# Altium PCB tof_sideXtal.PcbDoc (part 2 of 2)
Units mm, origin at the board's own origin, x right, y up, seen from the top; angles counter-clockwise.
Board outline 22 x 110.3 mm, 6 copper layers (Top Layer, Timing, InternalPlane1, InternalPlane2, Energy, Bottom Layer); 240 components, 145 nets, 707 pads, 213 vias.
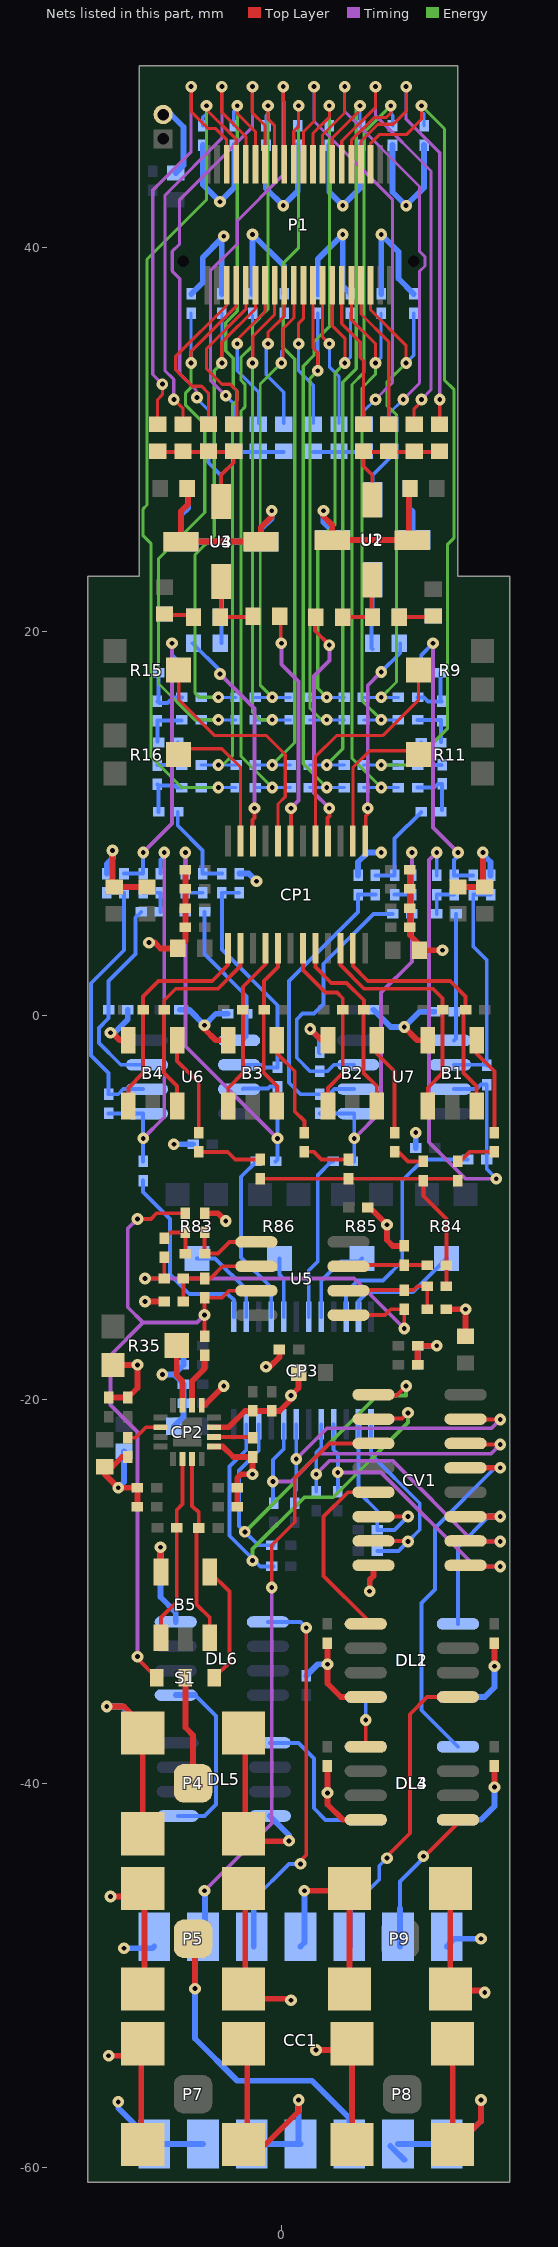
[diagram p6: the nets of this part, all layers, seen from the top]

## Via types
v1: diameter 0.61, hole 0.25, Top Layer to Bottom Layer, 213 vias

## Nets (pads, with @x,y where several pads share a name; then routed paths per layer and width w, separated by ;. In a path a pad name is that pad's centre, name@x,y a point inside that pad or via, vN(x,y) a via of type N, cw(c..) or ccw(c..) an arc to the next point about the centre after c; other vN are vias at no path point) (continued)
GND: B1.4 B2.4 B3.4 B4.4 B5.4 C17.2 C19.2 C21.2 C22.2 C23.2 C24.2 C25.2 C28.2 C29.1 C30.1 C31.1 C32.1 C33.2 C34.1 C35.1 C36.1 C37.1 C39.2 C43.2 C44.1 C46.2 C47.1 C48.1 C49.1 C50.1 C51.2 C52.1 C53.1 C54.1 C55.1 C56.1 C57.1 C58.1 C59.1 C60.2 C61.2 C62.2 C63.1 C64.2 C65.2 C66.1 C67.2 C68.2 C69.1 C70.1 C71.1 C72.1 C74.2 C76.2 C78.2 C80.2 C81.1 C82.1 C83.1 C84.1 C85.1 C86.1 CC1.1 CC1.4 CC1.7 CC1.8 CC1.9 CC1.11 CC1.12 CC1.13 CC1.14 CP2.1 CP2.13 CP2.15 CV1.8 DL1.4 DL2.4 DL3.4 DL4.4 DL5.4 DL6.4 P4.2 P5.2 P6.2 P7.2 P8.2 P9.2 R1g.1 R2.2 R2g.1 R3g.1 R4g.1 R5g.1 R6g.1 R7.2 R7g.1 R8g.1 R9g.1 R10g.1 R11g.1 R12g.1 R13g.1 R14g.1 R15g.1 R16g.1 R32.2 R33.1 R34.2 R35.CCW R71.2 R73.2 R87.2 R89.2 U1.2 U1.4 U2.2 U2.4 U3.2 U3.4 U4.2 U4.4 | length 308.7
  Top Layer w0.3: v1(-9,-54.2) P7.2@-7.3,-54.2 ; C47.1@-9,-19.9 C50.1@-8,-19.9 -7.5,-19.4 v1(-7.5,-18.2) R35.CCW@-8.775,-18.2 ; v1(-8.9,-45.9) -7.225,-45.9 -7.2,-45.9 -7.125,-45.975 -7.125,-50.725 P5.2@-7.125,-51.225 ; v1(-8.9,-0.9) -8.8,-0.9 -8.415,-1.285 B4.4@-7.97,-1.285 ; v1@-8.8,-36 -8.2,-36 -7.225,-36.975 P4.2@-7.225,-37.375 -7.225,-37.775 P4.2@-7.225,-42.625 P4.2@-7.225,-43.025 ; v1(-8.8,8.6) -8.8,7 -8.6,6.8 -8.5,6.7 C61.2@-7,6.7 ; R33.1@-8,-23 -8.3,-23 -8.8,-23.5 C51.2@-9.2,-23.5 -9.2,-23.9 v1(-8.5,-24.6) C52.1@-7.5,-24.6 C53.1@-7.5,-25.6 ; P7.2@-7.3,-58.9 -7.3,-58.825 P7.2@-7.3,-54.2 ; v1(-7.1,-14.9) R2.2@-6.1,-14.9 ; v1(-6.9,3.8) -6.6,3.8 -6.3,3.5 C28.2@-5.4,3.5 -5,3.9 C29.1@-5,4.6 C32.1@-5,5.6 C31.1@-5,6.6 C30.1@-5,7.6 ; v1(-6.3,-27.7) -6.3,-28.955 B5.4@-6.27,-28.985 ; C24.2@-4.854,27.464 -4.854,26.646 -5.225,26.275 U4.2@-5.225,24.696 U4.4@-1.055,24.696 -1.055,25.445 -0.5,26 v1(-0.5,26.3) ; CP2.1@-4.15,-20.303 -4.003,-20.303 v1(-3,-19.3) ; C43.2@-4,-10.3 -3.3,-10.3 v1(-2.9,-10.7) ; v1(-4,-0.5) -4,-0.7 -3.415,-1.285 B3.4@-2.77,-1.285 ; CP2.13@-3.503,-22.45 -3.05,-22.45 -2.5,-23 R34.2@-1.5,-23 v1(-1.5,-23.9) -2.1,-23.9 -2.3,-24.1 C54.1@-2.3,-24.6 C55.1@-2.3,-25.6 ; CP2.15@-3.503,-21.45 -2.75,-21.45 -1.9,-20.6 C48.1@-1.5,-20.6 C49.1@-0.5,-20.6 -0.1,-20.6 0.5,-20 v1(0.5,-19.8) 0.9,-19.4 C22.2@0.9,-18.6 ; P5.2@-1.875,-45.975 -1.875,-50.725 -1.875,-51.225 0.425,-51.225 v1(0.5,-51.3) ; P4.2@-1.875,-37.775 -1.875,-42.625 -1.875,-43.025 0.375,-43.025 v1(0.4,-43) ; P7.2@-1.775,-53.575 -1.775,-58.825 -0.825,-58.825 0.9,-57.1 v1(0.9,-56.5) ; v1(-0.8,-18.3) -0.6,-18.3 -0.1,-17.8 C39.2@-0.1,-17.4 ; v1(1.2,-45.6) 3.18,-45.6 3.305,-45.725 3.555,-45.975 P9.2@3.555,-50.725 P9.2@3.555,-51.225 ; v1(1.5,-0.7) 2.085,-1.285 B2.4@2.43,-1.285 ; v1(1.8,-53.9) 3.4,-53.9 3.675,-54.175 P8.2@3.675,-58.825 P8.2@3.675,-59.425 ; v1(2.2,26.3) 2.2,26 2.65,25.55 U1.2@2.65,24.772 U1.4@6.82,24.772 6.652,24.94 C17.2@6.652,27.464 ; C83.1@2.4,-39.1 v1(2.4,-40.5) 2.4,-41.1 3.205,-41.905 DL3.4@4.4,-41.905 ; C82.1@2.4,-32.7 v1(2.4,-33.8) 2.4,-34.8 3.105,-35.505 DL1.4@4.4,-35.505 ; C44.1@4.5,-10 4.6,-10 v1(5.5,-10.9) 5.5,-11.7 5.8,-12 R32.2@6.4,-12 ; v1(4.6,-30) 4.6,-29.4 4.8,-29.2 CV1.8@4.8,-28.645 ; v1(6.4,-0.6) 7.085,-1.285 B1.4@7.63,-1.285 ; C35.1@6.7,7.6 C37.1@6.7,6.6 C36.1@6.7,5.6 C34.1@6.7,4.6 6.7,4.2 7.2,3.7 C33.2@7.2,3.4 v1(8.4,3.4) ; C58.1@7.1,-18.1 C56.1@7.1,-17.2 v1(8.1,-17.2) ; R7.2@8.6,-15.3 v1(9.6,-15.3) C21.2@9.6,-16.7 ; P9.2@8.805,-50.8 v1@10.6,-50.8 ; P9.2@8.805,-50.725 P9.2@8.805,-45.975 ; P8.2@8.925,-53.575 P8.2@8.925,-58.825 8.925,-59.075 9.05,-58.95 10.4,-57.6 v1(10.4,-56.5) ; C63.1@9.2,6.7 C66.1@10.6,6.7 10.5,6.8 v1(10.5,8.5) ; v1(11.1,-40.2) C86.1@11.1,-39.1 ; v1(11.1,-33.9) C85.1@11.1,-32.7 ; P7.2@-7.3,-54.2 -7.225,-54.2 -7.15,-54.2 -7.3,-54.05 P7.2@-7.3,-54.2
  Bottom Layer w0.3: R71.2@-9.1,7.4 -9.1,7.9 -8.8,8.2 v1(-8.8,8.6) ; v1(-8.9,-0.9) -8.7,-0.9 -8,-0.2 C74.2@-8,0.3 ; v1@-8.8,-36 -8.3,-36 C81.1@-7.4,-36.9 ; v1(-8.5,-56.6) -8.5,-56.92 CC1.14@-6.62,-58.8 CC1.13@-4.08,-58.8 ; v1(-8.5,-24.6) -8.2,-24.3 C46.2@-8.2,-22.7 ; v1(-8.2,-48.6) -6.72,-48.6 CC1.1@-6.62,-48.5 ; v1(-6.3,-27.7) -6.3,-30.3 -5.5,-31.1 DL6.4@-5.5,-31.595 ; v1(-6.2,-18.7) -5.6,-18.7 ; P6.2@-6.161,46.946 -5.746,46.946 -5.1,46.3 -5.1,44.3 C23.2@-5.5,43.9 ; C68.2@-5.6,-21.4 -5.1,-20.9 C70.1@-5.1,-20.2 C72.1@-5.1,-19.2 ; v1(-5.6,-6.7) C65.2@-4.6,-6.7 ; C67.2@-5.3,0.3 -4.8,0.3 v1(-4,-0.5) -3.4,0.1 C76.2@-2.8,0.1 ; C71.1@-5.1,-17.2 C69.1@-5.1,-18.2 -5.6,-18.7 ; C25.2@-4.854,27.464 -4.854,26.446 -5.225,26.075 U3.4@-5.225,24.696 U3.2@-1.055,24.696 -1.055,25.345 -0.5,25.9 v1(-0.5,26.3) ; R8g.1@-4.7,37.6 -4.1,38.2 -4.1,39.5 v1@-3.1,40.5 ; R16g.1@-4.093,45.352 -4.093,43.293 v1(-3.2,42.4) -2.446,43.154 R12g.1@-2.446,45.352 ; R4g.1@-3.1,37.6 v1@-3.1,40.5 ; v1(-3,40.6) v1@-3.1,40.5 ; R73.2@-2.2,7.4 -1.7,7.4 v1(-1.3,7) ; CC1.12@-1.54,-58.8 CC1.11@1,-58.8 0.9,-58.7 v1(0.9,-56.5) ; R7g.1@-1.5,37.6 v1(-1.5,40.7) 0.15,39.05 R3g.1@0.15,37.6 ; R15g.1@-0.799,45.352 -0.799,43.099 v1(0.1,42.2) 0.848,42.948 R11g.1@0.848,45.352 ; DL5.4@-0.6,-41.705 0.4,-42.705 v1(0.4,-43) ; CC1.4@1,-48.5 1.2,-48.3 1.2,-48 v1(1.2,-45.6) ; C84.1@1.3,-34.4 1.9,-33.8 v1@2.3,-33.8 ; v1(1.5,-0.7) 2,-1.2 C80.2@2,-1.9 ; R6g.1@1.9,37.6 1.9,39.4 v1(3.2,40.7) 3.2,38.002 R2g.1@3.602,37.6 ; v1(2.2,26.3) 2.2,25.7 2.889,25.011 3.104,24.796 U2.2@6.845,24.796 6.845,26.255 6.652,26.448 C19.2@6.652,27.464 ; R14g.1@2.495,45.352 2.495,42.905 v1(3.2,42.2) 4.142,43.142 R10g.1@4.142,45.352 ; R89.2@4,7.3 4,8 4.5,8.5 v1(5.2,8.5) ; C64.2@4.8,0.3 5.7,-0.6 v1(6.4,-0.6) 7.2,0.2 C78.2@8,0.2 ; R5g.1@5.2,37.6 v1(5.2,40.7) 6.1,39.8 6.1,38.396 R1g.1@6.896,37.6 ; CC1.9@5.68,-58.9 5.83,-59.05 6.4,-59.62 CC1.9@6.42,-59.62 ; R13g.1@5.789,45.352 5.789,42.911 v1(6.5,42.2) 7.436,43.136 R9g.1@7.436,45.352 ; CC1.9@6.08,-58.8 CC1.8@8.62,-58.8 9.2,-58.8 10.4,-57.6 v1(10.4,-56.5) ; C62.2@7,-6.9 7,-6.7 v1(7,-6.1) ; C59.1@7.108,-18.2 C57.1@7.108,-17.2 v1(8.1,-17.2) ; CC1.8@8.22,-58.9 8.37,-59.05 CC1.8@8.62,-59.3 ; CC1.7@8.62,-48.5 8.87,-48.25 9.02,-48.1 v1(10.4,-48.1) ; DL4.4@9.2,-41.905 10.395,-41.905 11.1,-41.2 v1(11.1,-40.2) ; DL2.4@9.2,-35.505 10.595,-35.505 11.1,-35 v1(11.1,-33.9) ; v1(10.5,8.5) 10.5,8.4 10.9,8 R87.2@10.9,7.3 ; -5.6,-18.7 C72.1@-5.1,-19.2 ; -5.6,-18.7 C72.1@-5.1,-19.2
  other v1: 10.6,-50.9 -9.1,-36
NetB1_1: B1.1 CP1.23 R17.2 | length 13.3
  Top Layer w0.2: CP1.23@3.725,3.5 3.725,2.575 4.5,1.8 8.8,1.8 9.6,1 R17.2@9.6,0.3 ; R17.2@9.487,0.187 9.487,-2.987 10.17,-3.67 B1.1@10.17,-4.715
NetB1_3: B1.3 CP1.22 R18.2 | length 12.7
  Top Layer w0.2: CP1.22@3.075,3.5 3.075,2.625 4.3,1.4 7.9,1.4 8.4,0.9 R18.2@8.4,0.3 ; B1.3@7.63,-4.715 7.63,-3.77 8.4,-3 R18.2@8.4,0.2
NetB1_5: B1.5 C38.1 | length 5.1
  Top Layer w0.2: B1.5@10.17,-1.285 10.17,-1.97 11.1,-2.9 C38.1@11.1,-6
NetB2_1: B2.1 CP1.20 R19.2 | length 9.9
  Top Layer w0.2: CP1.20@1.775,3.5 1.775,2.525 2.6,1.7 3.4,1.7 4.3,0.8 R19.2@4.3,0.3 ; R19.2@4.287,0.187 4.287,-2.987 4.97,-3.67 B2.1@4.97,-4.715
NetB2_3: B2.3 CP1.19 R20.2 | length 9.6
  Top Layer w0.2: CP1.19@1.125,3.5 1.125,2.375 2.3,1.2 2.9,1.2 3.2,0.9 R20.2@3.2,0.3 ; B2.3@2.43,-4.715 2.43,-3.77 3.2,-3 R20.2@3.2,0.2
NetB2_5: B2.5 C40.1 | length 5
  Top Layer w0.2: B2.5@4.97,-1.285 4.97,-1.97 5.9,-2.9 C40.1@5.9,-5.9
NetB3_1: B3.1 CP1.17 R21.2 | length 8.7
  Top Layer w0.2: R21.2@-0.913,0.187 -0.913,-2.987 -0.23,-3.67 B3.1@-0.23,-4.715 ; R21.2@-0.9,0.3 -0.9,1.8 -0.175,2.525 CP1.17@-0.175,3.5
NetB3_3: B3.3 CP1.16 R22.2 | length 8.9
  Top Layer w0.2: B3.3@-2.77,-4.715 -2.77,-3.77 -2,-3 R22.2@-2,0.2 ; R22.2@-2,0.3 -2,1.5 -0.825,2.675 CP1.16@-0.825,3.5
NetB3_5: B3.5 C41.1 | length 5.4
  Top Layer w0.2: B3.5@-0.23,-1.285 -0.23,-1.97 0.7,-2.9 0.7,-5 1.2,-5.5 C41.1@1.2,-6.1
NetB4_1: B4.1 CP1.14 R23.2 | length 11.3
  Top Layer w0.2: R23.2@-6.1,0.2 -6.113,0.187 -6.113,-2.987 -5.43,-3.67 B4.1@-5.43,-4.715 ; R23.2@-6.1,0.3 -6.1,0.8 -5.5,1.4 -3.3,1.4 -2.125,2.575 CP1.14@-2.125,3.5
NetB4_3: B4.3 CP1.13 R24.2 | length 11.9
  Top Layer w0.2: B4.3@-7.97,-4.715 -7.97,-3.77 -7.2,-3 R24.2@-7.2,0.2 ; R24.2@-7.2,0.3 -7.2,1 -6.4,1.8 -3.6,1.8 -2.775,2.625 CP1.13@-2.775,3.5
NetB4_5: B4.5 C45.1 | length 5.3
  Top Layer w0.2: B4.5@-5.43,-1.285 -5.43,-2.37 -4.3,-3.5 C45.1@-4.3,-6.1
NetB5_1: B5.1 CP2.11 R36.2 | length 9.8
  Top Layer w0.2: CP2.11@-4.65,-23.097 -4.65,-25.55 -4.3,-25.9 R36.2@-4.3,-26.7 -4.413,-26.813 -4.413,-30.687 -3.73,-31.37 B5.1@-3.73,-32.415
NetB5_3: B5.3 CP2.10 R37.2 | length 9.8
  Top Layer w0.2: B5.3@-6.27,-32.415 -6.27,-31.37 -5.453,-30.553 R37.2@-5.453,-26.682 -5.453,-25.753 -5.15,-25.45 CP2.10@-5.15,-23.097
NetB5_5: B5.5 S1.1 | length 6.3
  Top Layer w0.2: B5.5@-3.73,-28.985 -2.7,-30.015 -2.7,-33.7 S1.1@-3.5,-34.5
NetC1_1: C1.1 C5.1 C9.1 C13.1 U1.1 | length 6.7
  Top Layer w0.2: U1.1@4.735,26.857 4.735,28.165 4.278,28.622 4.278,29.356 5.599,29.356 6.92,29.356 C9.1@8.241,29.356
NetC1_2: C1.2 P1.4 | length 7.8
  Top Layer w0.165: P1.4@4.15,38.05 4.15,36.55 5.599,35.101 C1.2@5.599,30.856
NetC2_1: C2.1 C6.1 C10.1 C14.1 U2.1 | length 6.8
  Bottom Layer w0.2: C6.1@1.678,29.356 2.999,29.356 4.32,29.356 5.641,29.356 5.641,29.041 4.76,28.16 U2.1@4.76,26.881
NetC2_2: C2.2 P1.8 | length 7.5
  Top Layer w0.165: P1.8@2.15,38.05 2.15,35.35 v1(2.5,35)
  Bottom Layer w0.165: v1(2.5,35) 2.5,33.8 2.999,33.301 C2.2@2.999,30.856
NetC3_1: C3.1 C7.1 C11.1 C15.1 U3.1 | length 6.8
  Bottom Layer w0.2: U3.1@-3.14,26.781 -3.14,28.14 -3.799,28.799 -3.799,29.356 -2.478,29.356 -1.199,29.356 C3.1@0.122,29.356
NetC3_2: C3.2 P1.12 | length 8
  Top Layer w0.165: v1(-0.7,35) -0.7,35.586 0.15,36.436 P1.12@0.15,38.05
  Bottom Layer w0.165: v1(-0.7,35) -0.791,34.909 -0.791,33.391 0.122,32.478 C3.2@0.122,30.856
NetC4_1: C4.1 C8.1 C12.1 C16.1 U4.1 | length 6.8
  Top Layer w0.2: C16.1@-6.441,29.356 -5.12,29.356 -3.799,29.356 -2.478,29.356 -2.478,28.822 -3.14,28.16 U4.1@-3.14,26.781
NetC4_2: C4.2 P1.16 | length 9
  Top Layer w0.165: C4.2@-2.478,30.856 -2.309,31.025 -2.309,32.545 -2.655,32.891 -3.091,32.891 -3.9,33.7 -3.9,34.752 -1.85,36.802 P1.16@-1.85,38.05
NetC5_2: C5.2 P1.6 | length 7.7
  Top Layer w0.165: P1.6@3.15,38.05 3.15,36.05 4.111,35.089 4.111,34.289 4.278,34.122 C5.2@4.278,30.856
NetC6_2: C6.2 P1.10 | length 7.6
  Top Layer w0.165: v1(0.9,35) 0.9,36.063 1.15,36.313 P1.10@1.15,38.05
  Bottom Layer w0.165: v1(0.9,35) 0.9,33.6 1.678,32.822 C6.2@1.678,30.856
NetC7_2: C7.2 P1.14 | length 8.3
  Top Layer w0.165: v1(-2.3,35) -2.3,35.226 -0.85,36.676 P1.14@-0.85,38.05
  Bottom Layer w0.165: v1(-2.3,35) -2.3,33.6 -1.199,32.499 C7.2@-1.199,30.856
NetC8_2: C8.2 P1.18 | length 9.3
  Top Layer w0.165: C8.2@-3.799,30.856 -3.799,32.434 -4.155,32.791 -4.645,32.791 -5.5,33.646 -5.5,34.346 -2.85,36.996 P1.18@-2.85,38.05
NetC9_2: C9.2 P1.37 | length 23.8
  Top Layer w0.165: P1.37@4.15,44.35 4.15,45.55 5.038,46.438 5.838,46.438 6.513,47.113 v1@6.513,48.4 ; C9.2@8.25,30.865 v1(8.25,32.1)
  Timing w0.165: v1(6.5,48.4) 6.5,46.7 8.25,44.95 v1(8.25,32.1)
NetC10_2: C10.2 P1.33 | length 24.6
  Top Layer w0.152: P1.33@2.15,44.35 2.15,45.885 3.288,47.022 v1@3.288,48.4
  Timing w0.152: v1(3.3,48.4) 3.3,47.1 7.2,43.2 7.2,39.819 7.479,39.54 7.479,39.06 7.2,38.781 7.2,32.95 v1(6.35,32.1)
  Bottom Layer w0.152: C10.2@5.641,30.856 5.641,31.391 v1(6.35,32.1)
NetC11_2: C11.2 P1.29 | length 23.7
  Top Layer w0.165: v1(0.1,48.4) 0.1,47.67 0.15,47.62 P1.29@0.15,44.35
  Timing w0.165: v1(-2.9,32.3) -3.7,33.1 -3.7,38.8 -2.3,40.2 -2.3,41.4 0.1,43.8 v1(0.1,48.4)
  Bottom Layer w0.165: v1(-2.9,32.3) -2.478,31.878 C11.2@-2.478,30.856
NetC12_2: C12.2 P1.25 | length 23.9
  Top Layer w0.165: v1(-5.6,32.1) -5.5,32.1 -5.5,32 -5.12,31.62 C12.2@-5.12,30.856 ; v1@-3.113,48.4 -3.113,47.065 -1.85,45.802 P1.25@-1.85,44.35
  Timing w0.165: v1(-5.6,32.1) -5.5,32.1 -5.55,32.15 -5.608,32.208 -5.608,32.756 -5.609,32.758 -5.609,33.145 -6.061,33.596 -6.061,42.739 -3.1,45.7 v1(-3.1,48.4)
NetC13_2: C13.2 P1.35 | length 23.9
  Top Layer w0.165: P1.35@3.15,44.35 3.15,45.564 4.913,47.327 v1@4.913,48.4 ; C13.2@6.92,30.856 6.92,31.62 7.3,32 v1(7.3,32.1)
  Timing w0.165: v1(4.9,48.4) 4.9,46.9 7.798,44.002 7.798,32.598 v1(7.3,32.1)
NetC14_2: C14.2 P1.31 | length 24.1
  Top Layer w0.152: P1.31@1.15,44.35 1.15,46.053 1.713,46.616 v1@1.713,48.4
  Timing w0.152: v1(1.7,48.4) 1.7,46.6 5.8,42.5 5.8,33 v1(4.9,32.1)
  Bottom Layer w0.152: C14.2@4.32,30.856 4.32,31.52 v1(4.9,32.1)
NetC15_2: C15.2 P1.27 | length 24.5
  Top Layer w0.165: v1@-1.513,48.4 -1.513,47.048 -0.85,46.385 P1.27@-0.85,44.35
  Timing w0.165: v1(-4.4,32.2) -4.45,32.2 -4.45,32.596 -5.292,33.438 -5.292,38.392 -5.686,38.786 -5.686,39.814 -5.3,40.2 -5.3,42.5 -1.5,46.3 v1(-1.5,48.4)
  Bottom Layer w0.165: v1(-4.4,32.2) -4.45,32.2 -4.425,32.175 -3.799,31.549 C15.2@-3.799,30.856
NetC16_2: C16.2 P1.23 | length 23.7
  Top Layer w0.165: C16.2@-6.45,30.865 -6.45,32.1 -6.2,32.35 v1(-6.2,32.9) ; v1@-4.688,48.4 -4.688,47.099 -3.799,46.21 -3.418,46.21 -2.85,45.642 P1.23@-2.85,44.35
  Timing w0.165: v1(-6.2,32.9) -6.7,33.4 -6.7,43 -4.7,45 v1(-4.7,48.4)
NetC18_1: C18.1 L1.1 U1.3 | length 3.3
  Top Layer w0.2: C18.1@3.25,20.759 4.697,20.759 U1.3@4.697,22.648
NetC18_2: C18.2 CP1.4 | length 12.7
  Top Layer w0.2: C18.2@1.75,20.759 1.75,20.05 v1(2.5,19.3) ; CP1.4@2.425,9.1 2.4,9.125 2.4,10.3 2.5,10.4 v1(2.5,10.8)
  Timing w0.2: v1(2.5,10.8) 1.7,11.6 1.7,17.7 2.5,18.5 v1(2.5,19.3)
NetC20_1: C20.1 L2.1 U2.3 | length 3.6
  Bottom Layer w0.2: L2.1@4.697,20.759 4.697,19.4 4.697,19.153 C20.1@4.75,19.1 ; L2.1@4.76,20.822 U2.3@4.76,22.711
NetC20_2: C20.2 CP1.1 | length 11.1
  Top Layer w0.2: CP1.1@4.375,9.1 4.4,9.125 4.4,10.4 4.5,10.5 v1(4.5,10.8)
  Timing w0.2: v1(4.5,10.8) 4.5,17.2 v1(5.2,17.9)
  Bottom Layer w0.2: v1(5.2,17.9) 6.197,18.897 C20.2@6.197,19.4
NetC26_1: C26.1 L3.1 U4.3 | length 3.4
  Top Layer w0.2: L3.1@-3.14,20.772 U4.3@-3.14,22.611 ; L3.1@-3.127,20.759 C26.1@-1.579,20.759
NetC26_2: C26.2 CP1.7 | length 12.3
  Top Layer w0.2: C26.2@-0.028,20.81 -0.028,19.428 v1(0,19.4) ; CP1.7@0.475,9.1 0.5,9.125 v1(0.5,10.8)
  Timing w0.2: v1(0,19.4) 0,18.3 0.9,17.4 0.9,11.2 v1(0.5,10.8)
NetC27_1: C27.1 L4.1 U3.3 | length 3.1
  Bottom Layer w0.2: C27.1@-3.127,19.4 L4.1@-3.127,20.759 ; L4.1@-3.076,20.81 U3.3@-3.076,22.547
NetC27_2: C27.2 CP1.10 | length 11.7
  Top Layer w0.2: CP1.10@-1.475,9.1 -1.5,9.125 -1.5,10.2 -1.4,10.3 v1(-1.4,10.8)
  Timing w0.2: v1(-3.2,17.8) -1.4,16 v1(-1.4,10.8)
  Bottom Layer w0.2: C27.2@-4.627,19.4 -4.602,19.375 -3.2,17.973 v1(-3.2,17.8)
NetC38_2: C38.2 RX1.2 | length 2.1
  Top Layer w0.2: RX1.2@9.2,-7.6 9.3,-7.6 9.8,-7.1 C38.2@11.1,-7.1
NetC40_2: C40.2 RX2.2 | length 1.7
  Top Layer w0.2: C40.2@5.9,-7.1 6.1,-7.1 6.6,-7.6 RX2.2@7.4,-7.6
NetC41_2: C41.2 RX3.2 | length 2.5
  Top Layer w0.2: C41.2@1.2,-7.1 1.7,-7.1 2.1,-7.5 RX3.2@3.5,-7.5
NetC42_1: C42.1 R29.1 R30.2 | length 2.3
  Top Layer w0.2: R29.1@-6.1,-11.6 -5.8,-11.3 C42.1@-5,-11.3 R30.2@-5,-12.4
NetC42_2: C42.2 R27.1 RXA1.2 S1.2 U5.7 | length 36.9
  Top Layer w0.2: v1(-7.5,-33.4) -7.5,-33.5 S1.2@-6.5,-34.5 ; v1(-7.5,-10.6) -6.8,-10.6 -6.5,-10.3 C42.2@-5,-10.3 ; RXA1.2@-4,-16.7 v1(-4,-15.6) R27.1@-4,-14.7 -3.1,-14.7 -2.735,-14.335 U5.7@-1.35,-14.335
  Timing w0.2: v1(-7.5,-33.4) -7.5,-21.7 -8.9,-20.3 -8.9,-17.7 -7.2,-16 ; v1(-7.5,-10.6) -8,-11.1 -8,-15.2 -7.2,-16 ; v1(-4,-15.6) -4.4,-16 -7.2,-16
NetC43_1: C43.1 R30.1 U5.5 | length 4
  Top Layer w0.2: C43.1@-4,-11.3 R30.1@-4,-12.4 -3.3,-12.4 -2.695,-11.795 U5.5@-1.35,-11.795
NetC45_2: C45.2 RX4.2 | length 3.4
  Top Layer w0.2: C45.2@-4.3,-7.1 -4.292,-7.108 -2.792,-7.108 -2.4,-7.5 RX4.2@-1.1,-7.5
NetC73_1: C73.1 R79.1 R80.2 | length 1.9
  Bottom Layer w0.2: R79.1@-7.2,6.4 C73.1@-6.3,6.4 R80.2@-6.3,5.4
NetC73_2: C73.2 R72.1 R77.2 U6.1 | length 20.8
  Timing w0.2: v1(-7.2,-6.4) -6.1,-5.3 v1(-6.1,8.5)
  Bottom Layer w0.2: R72.1@-9,-5.1 -7.205,-5.1 -7.2,-5.105 v1(-7.2,-6.4) R77.2@-7.2,-7.6 ; C73.2@-6.3,7.4 -6.3,8.1 -6.1,8.3 v1(-6.1,8.5)
NetC74_1: C74.1 R80.1 U6.3 | length 10.5
  Bottom Layer w0.2: R80.1@-7.3,5.4 -7.6,5.1 -7.6,3.2 -9,1.8 C74.1@-9,0.3 -9,-0.14 -9.508,-0.648 -9.508,-1.422 -8.365,-2.565 U6.3@-7.2,-2.565
NetC75_1: C75.1 R81.1 R82.2 | length 1.9
  Bottom Layer w0.2: R82.2@-5,5.4 C75.1@-5,6.4 R81.1@-4.1,6.4
NetC75_2: C75.2 R74.1 R78.2 U6.7 | length 23.8
  Timing w0.2: v1(-5,8.5) -5,-1.6 v1(-0.2,-6.4)
  Bottom Layer w0.2: C75.2@-5,7.4 v1(-5,8.5) ; U6.7@-2,-3.835 -1.965,-3.8 -0.7,-3.8 -0.6,-3.7 R74.1@-0.2,-3.7 v1(-0.2,-6.4) -0.2,-7.5 R78.2@-0.3,-7.6
NetC76_1: C76.1 R82.1 U6.5 | length 7.7
  Bottom Layer w0.2: R82.1@-4,5.4 -4,3.2 -1.8,1 C76.1@-1.8,0.1 -1.8,-1.095 U6.5@-2,-1.295
NetC77_1: C77.1 R95.1 R96.2 | length 1.9
  Bottom Layer w0.2: R96.2@8.1,5.3 C77.1@8.1,6.3 R95.1@9,6.3
NetC77_2: C77.2 R88.1 R93.2 U7.7 | length 27.7
  Timing w0.2: v1(8.1,8.5) 7.7,8.1 7.7,-6.6 9.6,-8.5 v1(11.2,-8.5)
  Bottom Layer w0.2: C77.2@8.1,7.3 v1(8.1,8.5) ; U7.7@9,-3.835 10.165,-3.835 10.4,-3.6 R88.1@10.7,-3.6 R93.2@10.7,-7.5 10.7,-8 v1(11.2,-8.5)
NetC78_1: C78.1 R96.1 U7.5 | length 6.6
  Bottom Layer w0.2: U7.5@9,-1.295 9.1,-1.195 9.1,0.2 R96.1@9.1,5.3
NetC79_1: C79.1 R97.1 R98.2 | length 1.9
  Bottom Layer w0.2: R97.1@5.9,6.3 C79.1@6.8,6.3 R98.2@6.8,5.3
NetC79_2: C79.2 R90.1 R94.2 U7.1 | length 21.6
  Timing w0.2: v1(3.8,-6.4) 5.2,-5 5.2,1.2 6.8,2.8 v1(6.8,8.5)
  Bottom Layer w0.2: R90.1@2,-5.1 3.795,-5.1 3.8,-5.105 v1(3.8,-6.4) R94.2@3.8,-7.6 ; C79.2@6.8,7.3 v1(6.8,8.5)
NetC80_1: C80.1 R98.1 U7.3 | length 13.9
  Bottom Layer w0.2: U7.3@3.8,-2.565 2.735,-2.565 2.4,-2.9 C80.1@2,-2.9 1.5,-2.9 0.8,-2.2 0.8,-0.2 1.1,0.1 1.7,0.1 2.2,0.6 2.2,2.7 4.8,5.3 R98.1@5.8,5.3
NetCC1_2: CC1.2 CV1.3 | length 31.1
  Top Layer w0.2: v1(-0.5,-29.8) -0.5,-27.6 0.7,-26.4 0.7,-24.1 2.505,-22.295 CV1.3@4.8,-22.295
  Timing w0.2: v1(-4,-45.6) -0.5,-42.1 v1(-0.5,-29.8)
  Bottom Layer w0.3: CC1.2@-3.98,-48.5 -3.98,-48 v1@-3.98,-45.72
NetCC1_3: CC1.3 DL6.5 | length 20.2
  Top Layer w0.2: v1(1,-44.2) 1,-44.04 1.3,-43.74 v1(1.3,-31.9)
  Bottom Layer w0.2: -1.44,-46.5 -1.44,-46.04 0.4,-44.2 v1(1,-44.2) ; DL6.5@-0.7,-31.595 0.995,-31.595 v1(1.3,-31.9)
  Bottom Layer w0.3: CC1.3@-1.44,-48.5 -1.44,-48 -1.44,-46.5
NetCC1_5: CC1.5 DL1.5 | length 16.2
  Top Layer w0.2: v1(5.5,-43.9) 5.5,-43.8 6.7,-42.6 6.7,-36.4 7.595,-35.505 DL1.5@9.2,-35.505
  Bottom Layer w0.2: CC1.5@3.64,-48.5 3.64,-48 3.64,-46.48 5.1,-45.02 5.1,-44.3 v1(5.5,-43.9)
NetCC1_6: CC1.6 DL3.5 | length 7.9
  Top Layer w0.2: v1(7.4,-43.8) 7.434,-43.834 9.2,-42.067 DL3.5@9.2,-41.905
  Bottom Layer w0.2: 6.18,-46.52 6.18,-45.12 7.4,-43.9 v1(7.4,-43.8)
  Bottom Layer w0.3: CC1.6@6.18,-48.5 6.18,-48 6.18,-46.52
NetCC1_10: CC1.10 P5.1 | length 16.8
  Top Layer w0.3: v1(-4.5,-50.7) P5.1@-4.5,-48.1
  Bottom Layer w0.3: v1(-4.5,-50.7) -4.5,-53.3 -2.3,-55.5 1.6,-55.5 3.54,-57.44 CC1.10@3.54,-58.8 CC1.10@3.54,-59.3
NetCP1_2: CP1.2 R11.W | length 7.7
  Top Layer w0.165: CP1.2@3.725,9.1 3.725,12.925 4.6,13.8 6.95,13.8 R11.W@7.15,13.6
NetCP1_5: CP1.5 R9.W | length 12.5
  Top Layer w0.165: CP1.5@1.775,9.1 1.775,13.475 2.9,14.6 5.3,14.6 7.15,16.45 R9.W@7.15,18
NetCP1_8: CP1.8 R15.W | length 12.9
  Top Layer w0.165: R15.W@-5.35,18 -5.35,16.45 -3.5,14.6 -0.8,14.6 0.2,13.6 0.2,11.4 -0.175,11.025 CP1.8@-0.175,9.1
NetCP1_11: CP1.11 R16.W | length 7.6
  Top Layer w0.165: R16.W@-5.35,13.6 -5.05,13.9 -3.1,13.9 -2.125,12.925 CP1.11@-2.125,9.1
NetCP2_2: CP2.2 RXA1.1 | length 2.9
  Top Layer w0.3: CP2.2@-4.65,-20.303 -4.65,-19.05 -4,-18.4 RXA1.1@-4,-17.7
NetCP2_3: CP2.3 R35.W | length 3.2
  Top Layer w0.3: R35.W@-5.45,-17.2 -5.45,-18.75 -5.16,-19.04 -5.16,-20.293 CP2.3@-5.15,-20.303
NetCP2_6: CP2.6 R33.2 | length 1.9
  Top Layer w0.2: R33.2@-8,-22 -7.6,-22 -7.05,-21.45 CP2.6@-6.297,-21.45
NetCP2_14: CP2.14 R34.1 | length 2
  Top Layer w0.2: CP2.14@-3.503,-21.95 -1.55,-21.95 R34.1@-1.5,-22
NetCP3_1: CP3.1 R77.1 | length 10.2
  Bottom Layer w0.2: R77.1@-7.2,-8.6 -7.2,-9.2 -5.8,-10.6 -5.8,-13.5 -4.8,-14.5 -2.8,-14.5 -2.475,-14.825 CP3.1@-2.475,-15.7
NetCP3_2: CP3.2 R83.W | length 4.7
  Bottom Layer w0.2: R83.W@-4.4,-12.65 -3.45,-12.65 -1.825,-14.275 CP3.2@-1.825,-15.7
NetCP3_4: CP3.4 R78.1 | length 9.1
  Bottom Layer w0.2: R78.1@-1.3,-7.6 -2.1,-8.4 -2.1,-12.6 -0.525,-14.175 CP3.4@-0.525,-15.7
NetCP3_5: CP3.5 R86.W | length 3.1
  Bottom Layer w0.2: R86.W@-0.1,-12.65 -0.1,-13.5 0.125,-13.725 CP3.5@0.125,-15.7
NetCP3_7: CP3.7 R94.1 | length 8.7
  Bottom Layer w0.2: CP3.7@1.425,-15.7 1.425,-13.275 1.9,-12.8 1.9,-8.3 2.6,-7.6 R94.1@2.7,-7.6
NetCP3_8: CP3.8 R85.W | length 4.5
  Bottom Layer w0.2: CP3.8@2.075,-15.7 2.075,-13.825 3.1,-12.8 4.05,-12.8 R85.W@4.2,-12.65
NetCP3_10: CP3.10 R93.1 | length 12.9
  Bottom Layer w0.2: CP3.10@3.375,-15.7 3.375,-14.425 4,-13.8 5.3,-13.8 6.3,-12.8 6.3,-8.6 7.4,-7.5 R93.1@9.7,-7.5
NetCP3_11: CP3.11 R84.W | length 6.3
  Bottom Layer w0.2: CP3.11@4.025,-15.7 4.025,-14.875 4.5,-14.4 6.85,-14.4 R84.W@8.6,-12.65
NetCP3_13: CP3.13 CV1.7 R38.2 | length 11
  Top Layer w0.2: CV1.7@4.8,-27.375 6.575,-27.375 v1(6.6,-27.4)
  Bottom Layer w0.2: CP3.13@4.675,-21.3 4.675,-22.875 7.208,-25.408 7.208,-26.792 v1(6.6,-27.4) 6.1,-27.9 R38.2@5,-27.9
NetCP3_14: CP3.14 CV1.6 R6.2 | length 9.7
  Top Layer w0.2: CV1.6@4.8,-26.105 4.805,-26.1 v1(6.6,-26.1)
  Bottom Layer w0.2: CP3.14@4.025,-21.3 4.025,-24.754 ; 4.071,-24.8 4.025,-24.754 ; v1(6.6,-26.1) 5.9,-26.8 R6.2@5,-26.8 5,-25.8 4.025,-24.825 4.025,-24.754
NetCP3_16: CP3.16 CV1.9 R40.2 | length 15.8
  Top Layer w0.2: CV1.9@9.655,-28.7 v1(11.4,-28.7)
  Timing w0.2: v1(2.943,-23.8) 5.2,-23.8 10.1,-28.7 v1(11.4,-28.7)
  Bottom Layer w0.2: CP3.16@2.725,-21.3 2.725,-22.625 2.943,-22.843 v1(2.943,-23.8) R40.2@2.943,-24.8
NetCP3_17: CP3.17 CV1.10 R39.2 | length 17
  Top Layer w0.2: CV1.10@9.625,-27.4 v1(11.4,-27.4)
  Timing w0.2: v1(1.814,-23.9) 2.522,-23.192 5.792,-23.192 10,-27.4 v1(11.4,-27.4)
  Bottom Layer w0.2: R39.2@1.814,-24.8 v1(1.814,-23.9) 1.814,-22.786 2.075,-22.525 CP3.17@2.075,-21.3
NetCP3_19: CP3.19 CV1.15 R42.2 | length 17.4
  Top Layer w0.2: CV1.15@9.625,-21.05 v1(11.4,-21.05)
  Timing w0.2: v1(0.775,-23.1) 2.375,-21.5 10.95,-21.5 v1(11.4,-21.05)
  Bottom Layer w0.2: R42.2@0.7,-25.4 0.7,-24.786 0.775,-24.711 v1(0.775,-23.1) CP3.19@0.775,-21.3
NetCP3_20: CP3.20 CV1.14 R41.2 | length 18.7
  Top Layer w0.2: CV1.14@9.655,-22.35 v1(11.4,-22.35)
  Timing w0.2: v1(-0.443,-24.271) 0.529,-24.271 1.968,-22.832 10.918,-22.832 v1(11.4,-22.35)
  Bottom Layer w0.2: R41.2@-0.443,-25.4 v1(-0.443,-24.271) -0.443,-23.143 0.125,-22.575 CP3.20@0.125,-21.3
NetCP3_22: CP3.22 CV1.1 R5.2 | length 21.8
  Top Layer w0.2: CV1.1@4.845,-19.8 6,-19.8 v1(6.5,-19.3)
  Energy w0.2: v1(-1.9,-26.9) 0.7,-24.3 0.7,-24.1 5,-19.8 6.5,-19.8 v1(6.5,-19.3)
  Bottom Layer w0.2: CP3.22@-1.175,-21.3 -1.175,-22.675 -2.2,-23.7 -2.2,-26.6 v1(-1.9,-26.9) -1.2,-27.6 R5.2@-0.5,-27.6 R5.2@-0.4,-27.6
NetCP3_23: CP3.23 CV1.2 R4.2 | length 23.5
  Top Layer w0.2: CV1.2@4.8,-21.025 4.825,-21 6.3,-21 v1@6.5,-20.8 ; v1@6.4,-20.7 v1@6.5,-20.8 ; v1@6.5,-20.8 6.6,-20.9 v1(6.6,-20.7) v1@6.5,-20.8
  Energy w0.2: v1(-1.5,-28.4) -1.5,-27.8 1.2,-25.1 2.703,-25.1 6.6,-21.203 v1(6.6,-20.7)
  Bottom Layer w0.2: CP3.23@-1.825,-21.3 -1.825,-22.625 -2.7,-23.5 -2.7,-27.1 -1.45,-28.35 -1.1,-28.7 R4.2@-0.5,-28.7 R4.2@-0.4,-28.7
NetCV1_5: CV1.5 DL1.1 | length 9.8
  Top Layer w0.2: DL1.1@4.5,-31.8 4.5,-31.695 4.5,-31.5 2.2,-29.2 2.2,-26.1 3.465,-24.835 CV1.5@4.8,-24.835
NetCV1_11: CV1.11 DL2.1 | length 8.7
  Top Layer w0.3: CV1.11@9.6,-26.105 11.395,-26.105 v1(11.4,-26.1)
  Bottom Layer w0.2: DL2.1@9.2,-31.695 9.2,-27.7 10.8,-26.1
  Bottom Layer w0.3: 10.8,-26.1 v1(11.4,-26.1)
NetCV1_13: CV1.13 DL4.1 | length 19
  Top Layer w0.3: CV1.13@9.6,-23.565 v1@11.395,-23.565
  Bottom Layer w0.2: DL4.1@9.2,-38.095 7.3,-36.195 7.3,-30.6 8,-29.9 8,-26.7 v1@11.14,-23.56
  Bottom Layer w0.3: v1@11.14,-23.56 v1(11.4,-23.56)
NetDL2_5: DL2.5 DL3.1 | length 2.6
  Top Layer w0.2: DL3.1@4.4,-38.095 v1(4.4,-36.7)
  Bottom Layer w0.2: v1(4.4,-36.7) DL2.5@4.4,-35.505
NetDL4_5: DL4.5 DL5.1 | length 8.2
  Bottom Layer w0.2: DL5.1@-0.6,-37.895 0.895,-37.895 1.7,-38.7 1.7,-41.3 2.305,-41.905 DL4.5@4.4,-41.905
NetDL5_5: DL5.5 DL6.1 | length 9.4
  Bottom Layer w0.2: DL5.5@-5.4,-41.705 -4.005,-41.705 -3.4,-41.1 -3.4,-36.5 DL6.1@-4.495,-35.405
  Bottom Layer w0.3: DL6.1@-5.5,-35.405 DL6.1@-4.495,-35.405
NetL1_2: L1.2 R8.2 | length 1.7
  Top Layer w0.2: L1.2@6.209,20.771 R8.2@7.91,20.771
NetL2_2: L2.2 R10.2 | length 1.7
  Bottom Layer w0.2: L2.2@6.197,20.759 R10.2@7.898,20.759
NetL3_2: L3.2 R13.2 | length 1.3
  Top Layer w0.2: R13.2@-6.087,20.872 L3.2@-4.74,20.872
NetL4_2: L4.2 R14.2 | length 1.5
  Bottom Layer w0.2: R14.2@-6.087,20.872 -4.74,20.872 L4.2@-4.627,20.759
NetP1_3: P1.3 R1g.2 R46.1 R47.2 | length 27.8
  Top Layer w0.165: P1.3@4.65,38.05 4.65,36.762 6.488,34.924 v1@6.488,34
  Energy w0.165: v1(5.202,16.583) 6,17.381 6,31.3 5.5,31.8 5.5,33 v1(6.5,34)
  Bottom Layer w0.165: R46.1@4.28,16.577 5.202,16.577 R47.2@6.099,16.577 ; v1(6.5,34) 6.896,34.396 R1g.2@6.896,36.6
NetP1_5: P1.5 R5g.2 R53.1 R54.2 | length 28.4
  Top Layer w0.165: P1.5@3.65,38.05 3.65,36.25 4.913,34.987 v1@4.913,34
  Energy w0.165: v1(4.9,34) 4.9,33.4 4.2,32.7 4.2,16.41 v1(5.202,15.408)
  Bottom Layer w0.165: R53.1@4.28,15.402 5.202,15.402 R54.2@6.099,15.402 ; v1(4.9,34) 5.2,34.3 R5g.2@5.2,36.6
NetP1_7: P1.7 R2g.2 R45.1 R46.2 | length 27.1
  Top Layer w0.165: P1.7@2.65,38.05 2.65,35.95 3.313,35.287 v1@3.313,34
  Energy w0.165: v1(2.366,16.583) 1.9,17.049 1.9,24.7 2.8,25.6 2.8,33.5 v1(3.3,34)
  Bottom Layer w0.165: R45.1@1.46,16.577 2.366,16.577 R46.2@3.28,16.577 ; v1(3.3,34) 3.602,34.302 R2g.2@3.602,36.6
NetP1_9: P1.9 R6g.2 R52.1 R53.2 | length 28.4
  Top Layer w0.165: P1.9@1.65,38.05 1.65,34.78 1.9,34.53 v1(1.9,33.6)
  Energy w0.165: v1@1.9,33.8 v1(1.9,33.6) 1.5,33.2 1.5,16 2.092,15.408 v1(2.366,15.408)
  Bottom Layer w0.165: R52.1@1.46,15.402 2.366,15.402 R53.2@3.28,15.402 ; v1(1.9,33.6) R6g.2@1.9,36.6
NetP1_11: P1.11 R3g.2 R44.1 R45.2 | length 27.3
  Top Layer w0.152: v1(0,34) -0.2,34 -0.1,34.1 0.087,34.287 0.087,35.784 0.65,36.347 P1.11@0.65,38.05
  Energy w0.152: v1(-0.471,16.583) -1.1,17.213 -1.1,32.9 -0.2,33.8 -0.2,34 v1(0,34)
  Bottom Layer w0.152: v1(0,34) 0,34.6 0.1,34.7 0.1,36.55 R3g.2@0.15,36.6
  Bottom Layer w0.165: R44.1@-1.359,16.577 -0.471,16.577 R45.2@0.46,16.577
NetP1_13: P1.13 R7g.2 R51.1 R52.2 | length 28.2
  Top Layer w0.152: v1@-1.488,34 -1.488,35.378 -0.35,36.515 P1.13@-0.35,38.05
  Energy w0.152: v1(-1.5,34) -1.5,15.8 -1.108,15.408
  Energy w0.165: -1.108,15.408 v1(-0.471,15.408)
  Bottom Layer w0.152: v1(-1.5,34) R7g.2@-1.5,36.5
  Bottom Layer w0.165: R51.1@-1.359,15.402 -0.471,15.402 R52.2@0.46,15.402
NetP1_15: P1.15 R4g.2 R43.1 R44.2 | length 28.3
  Top Layer w0.165: v1@-3.113,34 -3.113,35.073 -1.35,36.836 P1.15@-1.35,38.05
  Energy w0.165: v1(-3.282,16.583) -4.283,16.583 -4.5,16.8 -4.5,24 -3.5,25 -3.5,33.6 v1(-3.1,34)
  Bottom Layer w0.165: R43.1@-4.179,16.577 -3.282,16.577 R44.2@-2.359,16.577 ; v1(-3.1,34) R4g.2@-3.1,36.6
NetP1_17: P1.17 R8g.2 R50.1 R51.2 | length 31.6
  Top Layer w0.165: v1@-4.713,34 -4.713,34.587 -2.35,36.95 P1.17@-2.35,38.05
  Energy w0.165: v1(-4.7,34) -4.7,32.735 -4.991,32.445 -4.991,31.801 -3.989,30.8 -3.989,26.211 -6.4,23.8 -6.4,17.3 -4.508,15.408 v1(-3.282,15.408)
  Bottom Layer w0.165: v1(-4.7,34) R8g.2@-4.7,36.6 ; R50.1@-4.179,15.402 -3.282,15.402 R51.2@-2.359,15.402
NetP1_24: P1.24 R16g.2 R64.1 R65.2 | length 46.3
  Top Layer w0.165: v1(-3.9,47.4) -3.9,47.2 -2.35,45.65 P1.24@-2.35,44.35
  Energy w0.165: v1(-3.9,47.4) -3.9,42.5 -7,39.4 -7,26.6 -7.2,26.4 -7.2,25 -6.8,24.6 -6.8,13.5 -5.184,11.884 v1(-3.282,11.884)
  Bottom Layer w0.165: R64.1@-4.179,11.878 -3.282,11.878 R65.2@-2.359,11.878 ; R16g.2@-4.093,46.352 -4.093,46.807 -3.9,47 v1(-3.9,47.4)
NetP1_26: P1.26 R12g.2 R57.1 R58.2 | length 41.8
  Top Layer w0.165: v1@-2.311,47.389 -2.311,47.011 -1.35,46.05 P1.26@-1.35,44.35
  Energy w0.165: v1(-3.282,13.059) -3.041,13.059 -2.539,13.561 -2.539,31.825 -2.309,32.055 -2.309,32.545 -2.509,32.745 -2.509,34.245 -2.9,34.635 -2.9,36.1 -2.3,36.7 v1(-2.3,47.4)
  Bottom Layer w0.165: R57.1@-4.179,13.053 -3.282,13.053 R58.2@-2.359,13.053 ; R12g.2@-2.446,46.352 -2.5,46.406 -2.5,47.1 -2.3,47.3 v1(-2.3,47.4)
NetP1_28: P1.28 R15g.2 R65.1 R66.2 | length 43
  Top Layer w0.165: v1(-0.7,47.4) -0.7,46.717 -0.35,46.367 P1.28@-0.35,44.35
  Energy w0.165: v1(-0.7,47.4) -0.7,36.8 -1.5,36 -1.5,34.9 -2.1,34.3 -2.1,33.1 -1.9,32.9 -1.9,31.7 -2.1,31.5 -2.1,13.514 v1(-0.471,11.884)
  Bottom Layer w0.165: R65.1@-1.359,11.878 -0.471,11.878 R66.2@0.46,11.878 ; R15g.2@-0.799,46.352 -0.8,46.353 -0.8,46.9 -0.7,47 v1(-0.7,47.4)
NetP1_30: P1.30 R11g.2 R58.1 R59.2 | length 41.4
  Top Layer w0.165: P1.30@0.65,44.35 0.65,46.087 0.9,46.337 v1(0.9,47.4)
  Energy w0.165: v1(-0.471,13.059) 0.7,14.23 0.7,34.2 0.1,34.8 0.1,39.2 0.9,40 v1(0.9,47.4)
  Bottom Layer w0.165: R58.1@-1.359,13.053 -0.471,13.053 R59.2@0.46,13.053 ; R11g.2@0.848,46.352 0.9,46.404 v1(0.9,47.4)
NetP1_32: P1.32 R14g.2 R66.1 R67.2 | length 43
  Top Layer w0.165: P1.32@1.65,44.35 1.65,45.964 2.5,46.814 v1(2.5,47.4)
  Energy w0.165: v1(2.366,11.884) 1.139,13.111 1.139,33.839 1.7,34.4 1.7,35.1 2.6,36 2.5,36 v1(2.5,47.4)
  Bottom Layer w0.165: R66.1@1.46,11.878 2.366,11.878 R67.2@3.28,11.878 ; R14g.2@2.495,46.352 2.5,46.357 v1(2.5,47.4)
NetP1_34: P1.34 R10g.2 R59.1 R60.2 | length 41.6
  Top Layer w0.165: P1.34@2.65,44.35 2.65,45.724 4.1,47.174 v1(4.1,47.4)
  Energy w0.165: v1(2.366,13.059) 3.2,13.893 3.2,33 3.9,33.7 3.9,47.2 v1(4.1,47.4)
  Bottom Layer w0.165: R59.1@1.46,13.053 2.366,13.053 R60.2@3.28,13.053 ; v1(4.1,47.4) 4.1,46.394 R10g.2@4.142,46.352
NetP1_36: P1.36 R13g.2 R67.1 R68.2 | length 44.2
  Top Layer w0.165: P1.36@3.65,44.35 3.65,45.598 4.845,46.794 5.472,46.794 5.7,47.022 v1(5.7,47.4)
  Energy w0.165: v1(5.202,11.884) 3.683,13.404 3.683,32.883 4.3,33.5 4.3,46 v1(5.7,47.4)
  Bottom Layer w0.165: R67.1@4.28,11.878 5.202,11.878 R68.2@6.099,11.878 ; v1(5.7,47.4) 5.7,47 5.8,46.9 5.8,46.363 R13g.2@5.789,46.352
NetP1_38: P1.38 R9g.2 R60.1 R61.2 | length 45.4
  Top Layer w0.165: P1.38@4.65,44.35 4.65,45.45 5.1,45.9 6.509,45.9 7.3,46.691 v1(7.3,47.4)
  Energy w0.165: v1(5.202,13.059) 6.759,13.059 8.661,14.961 8.661,24.561 9,24.9 9,32.6 8.5,33.1 8.5,46.2 v1(7.3,47.4)
  Bottom Layer w0.165: R60.1@4.28,13.053 5.202,13.053 R61.2@6.099,13.053 ; v1(7.3,47.4) 7.3,47.1 7.436,46.964 R9g.2@7.436,46.352
NetP4_1: P4.1 S1.3 | length 6.1
  Top Layer w0.3: S1.3@-5,-34.5 -5,-37.1 -4.6,-37.5 P4.1@-4.6,-40 P4.1@-4.6,-40.4
NetR1_1: R1.1 R43.2 R49.2 | length 2.9
  Bottom Layer w0.2: R49.2@-6.457,16.372 -6.363,16.278 -5.923,16.278 -5.625,16.577 R43.2@-5.179,16.577 ; R49.2@-6.398,16.431 R1.1@-6.398,17.853
NetR1_2: R1.2 R75.2 R79.2 | length 15.3
  Timing w0.2: v1(-7.2,8.5) -5.7,10 v1(-5.7,19.4)
  Bottom Layer w0.2: R75.2@-8.2,7.4 R79.2@-7.2,7.4 v1(-7.2,8.5) ; v1(-5.7,19.4) -5.7,18.8 -5.398,18.498 R1.2@-5.398,17.853
NetR2_1: R2.1 R26.1 R27.2 U5.6 | length 5.2
  Top Layer w0.2: R2.1@-5.1,-14.9 R26.1@-5.1,-13.7 R27.2@-4,-13.7 -3.7,-13.7 -3.065,-13.065 U5.6@-1.35,-13.065
NetR3_1: R3.1 R47.1 R48.2 | length 2.8
  Bottom Layer w0.2: R47.1@7.099,16.577 7.444,16.577 7.648,16.372 R48.2@8.352,16.372 ; R48.2@8.293,16.431 R3.1@8.293,17.853
NetR3_2: R3.2 R91.2 R95.2 | length 15.5
  Timing w0.2: v1(7.9,19.4) 7.9,9.8 v1(9.2,8.5)
  Bottom Layer w0.2: R3.2@7.293,17.853 7.293,18.793 v1(7.9,19.4) ; v1(9.2,8.5) 9.2,8.3 9,8.1 R95.2@9,7.3 R91.2@10,7.3
NetR7_1: R7.1 R25.2 R28.2 U5.2 | length 5.3
  Top Layer w0.2: U5.2@3.55,-14.335 3.585,-14.3 R25.2@6.4,-14.3 6.9,-14.3 7.1,-14.1 R28.2@7.6,-14.1 R7.1@7.6,-15.3
NetR25_1: R25.1 R26.2 R29.2 U5.1 | length 20.7
  Top Layer w0.2: v1(-7.1,-13.7) R26.2@-6.1,-13.7 R29.2@-6.1,-12.6 ; U5.1@3.55,-15.605 5.395,-15.605 5.7,-15.3 R25.1@6.4,-15.3 v1(6.4,-16.3)
  Timing w0.2: v1(-7.1,-13.7) 3.8,-13.7 v1(6.4,-16.3)
NetR28_1: R28.1 R31.1 RX1.1 RX2.1 RX3.1 RX4.1 | length 16.2
  Top Layer w0.2: RX4.1@-1.1,-8.5 RX3.1@3.5,-8.5 7.4,-8.5 RX1.1@9.1,-8.5 ; RX2.1@7.4,-8.6 7.4,-9.4 8.6,-10.6 R31.1@8.6,-13 R28.1@8.6,-14.1
NetR31_2: R31.2 R32.1 U5.3 | length 4.1
  Top Layer w0.2: U5.3@3.55,-13.065 3.615,-13 R32.1@6.4,-13 R31.2@7.6,-13
NetR48_1: R48.1 R54.1 R56.2 | length 2.4
  Bottom Layer w0.2: R54.1@7.099,15.402 8.322,15.402 8.322,15.372 R56.2@8.322,14.25
NetR49_1: R49.1 R50.2 R55.2 | length 2.3
  Bottom Layer w0.2: R55.2@-6.457,14.286 R49.1@-6.457,15.372 R50.2@-5.209,15.372
NetR55_1: R55.1 R57.2 R62.2 | length 2.5
  Bottom Layer w0.2: R62.2@-6.449,13.053 R57.2@-5.179,13.053 -5.179,13.781 -5.398,14 R55.1@-5.398,14.227
NetR56_1: R56.1 R61.1 R63.2 | length 2.5
  Bottom Layer w0.2: R56.1@7.293,14.221 7.293,14.026 7.099,13.832 R61.1@7.099,13.053 R63.2@8.36,13.053
NetR62_1: R62.1 R64.2 R70.2 | length 2.7
  Bottom Layer w0.2: R62.1@-6.457,12.045 R62.1@-6.398,11.986 ; R70.2@-6.398,10.614 R62.1@-6.398,11.986 ; R64.2@-5.179,11.878 -5.46,11.878 -5.568,11.986 R62.1@-6.398,11.986
NetR63_1: R63.1 R68.1 R69.2 | length 2.7
  Bottom Layer w0.2: R68.1@7.099,11.878 7.964,11.878 8.156,12.07 R63.1@8.377,12.07 R69.2@8.377,10.698
NetR69_1: R69.1 R92.2 R97.2 | length 4.9
  Bottom Layer w0.2: R92.2@4.9,7.3 R97.2@5.9,7.3 5.9,9.221 R69.1@7.293,10.614
NetR70_1: R70.1 R76.2 R81.2 | length 4.8
  Bottom Layer w0.2: R70.1@-5.398,10.614 -5.398,9.898 -4.1,8.6 R81.2@-4.1,7.4 R76.2@-3.1,7.4
NetR71_1: R71.1 R72.2 R75.1 U6.2 | length 14.4
  Bottom Layer w0.2: R71.1@-9.1,6.4 R75.1@-8.2,6.4 -8.2,3.4 -9.913,1.687 -9.913,-2.087 -9,-3 R72.2@-9,-4.1 -8.5,-4.1 -8.235,-3.835 U6.2@-7.2,-3.835
NetR73_1: R73.1 R74.2 R76.1 U6.6 | length 13.1
  Bottom Layer w0.2: R73.1@-2.2,6.4 R76.1@-3.1,6.4 -3.1,3.44 -0.2,0.54 R74.2@-0.2,-2.7 -0.9,-2.7 -1.035,-2.565 U6.6@-2,-2.565
NetR87_1: R87.1 R88.2 R91.1 U7.6 | length 11.8
  Bottom Layer w0.2: U7.6@9,-2.565 10.665,-2.565 R88.2@10.7,-2.6 10.7,2.9 10,3.6 R91.1@10,6.3 R87.1@10.9,6.3
NetR89_1: R89.1 R90.2 R92.1 U7.2 | length 15.9
  Bottom Layer w0.2: U7.2@3.8,-3.835 2.765,-3.835 2.5,-4.1 R90.2@2,-4.1 1,-4.1 0.4,-3.5 0.4,1.8 4,5.4 R89.1@4,6.3 R92.1@4.9,6.3
pads on no net: B1.2 B2.2 B3.2 B4.2 B5.2 CP2.4 CP2.7 CP2.17 CV1.4 CV1.12 DL1.2 DL1.3 DL1.6 DL1.7 DL2.2 DL2.3 DL2.6 DL2.7 DL3.2 DL3.3 DL3.6 DL3.7 DL4.2 DL4.3 DL4.6 DL4.7 DL5.2 DL5.3 DL5.6 DL5.7 DL6.2 DL6.3 DL6.6 DL6.7 P1.41 P1.42

## Polygon pours and split planes (outlines as drawn)
GND on InternalPlane1 (split plane): 8.69,22.9 8.699,22.8 8.728,22.705 8.776,22.616 8.839,22.539 8.916,22.476 9.005,22.428 9.1,22.399 9.2,22.39 11.39,22.39 11.39,-60.29 -9.59,-60.29 -9.59,22.39 -7.4,22.39 -7.3,22.399 -7.205,22.428 -7.116,22.476 -7.039,22.539 -6.976,22.616 -6.928,22.705 -6.899,22.8 -6.89,22.9 -6.89,48.99 8.69,48.99
+HV on InternalPlane2 (split plane): 8.69,31.729 -6.89,31.729 -6.89,48.99 8.69,48.99
-5V on InternalPlane2 (split plane): 224 vertices, not listed, extent -8.771,-58.571 11.39,17.571
+5V on InternalPlane2 (split plane): 252 vertices, not listed, extent -9.59,-60.29 11.39,31.471

## Other copper
InternalPlane2 (plane layer: these items are gaps in the copper):
  lines w0.254: -7.4,31.6 9.2,31.6 ; -2.2,-16.7 -2.2,-18.7 -2.1,-18.8 -1.5,-19.4 -1.5,-45.3 -0.6,-46.2 -0.6,-58.1 0,-58.7 8.8,-58.7 10.2,-58.7 10.2,-53.1 9.9,-52.8 1.9,-52.8 0.4,-51.3 0.4,-19.1 0.2,-18.9 0.2,-16.4 0.5,-16.1 2.3,-16.1 2.5,-16.3 2.5,-18.6 3.6,-18.6 3.9,-18.6 3.9,-15.7 1.8,-13.6 1.8,-8.7 0.4,-7.3 0.4,1.6 5.1,1.6 5.3,1.4 5.3,-5.8 3.8,-7.3 3.8,-9.3 3.9,-9.4 7.7,-9.4 8.5,-10.2 8.5,-11.5 8.8,-11.8 10.7,-11.8 10.8,-11.7 10.8,-10.1 9.4,-8.7 7.4,-8.7 7.4,2.8 11.9,2.8 11.9,5.3 9,5.3 8.9,5.4 8.9,7.6 4.6,7.6 4.4,7.8 4.4,9.2 7.3,9.2 9.4,11.3 9.4,12.7 10.9,14.2 10.9,17.7 8.4,17.7 8.4,12.2 6.1,9.9 3.2,9.9 2.3,9 2.3,7.1 2.6,6.8 4.4,6.8 4.4,4.1 4.3,4 -2.6,4 -2.7,4.1 -2.7,5.6 -2.2,6.1 -0.9,6.1 0.129,7.129 0.129,10.171 -1.2,11.5 -5.5,11.5 -6.3,12.3 -6.3,17.1 -6.6,17.4 -8.9,17.4 -8.9,14.4 -7.8,14.4 -7.3,13.9 -7.3,11.8 -6.1,10.6 -3.3,10.6 -2.159,9.459 ; -2.2,-16.571 -2.2,-12.3 -2.1,-12.2 -0.7,-12.2 0,-11.5 0,-9.2 -4,-9.2 -4.1,-9.1 -4.1,-7.3 -1.3,-7.3 -1.3,1.5 -8,1.5 -8,3.8 -5.4,6.4 -3.4,6.4 -2.2,7.6 -2.2,9.459

## Silkscreen, mask and mechanical layers (free items; w line width, h text height)
Mechanical 1:
  the board outline again, w1.2

## Text inside footprints (layer, text, board x,y; h text height)
P1: Mechanical 1 "J1" at 0.454,40.743 h0.76